# Altium PCB PCB2.PcbDoc
Units mm, origin at the board's own origin, x right, y up, seen from the top; angles counter-clockwise.
Board outline 152.4 x 101.6 mm, 2 copper layers (Top Layer, Bottom Layer); 8 components, 19 nets, 63 pads, 19 vias.
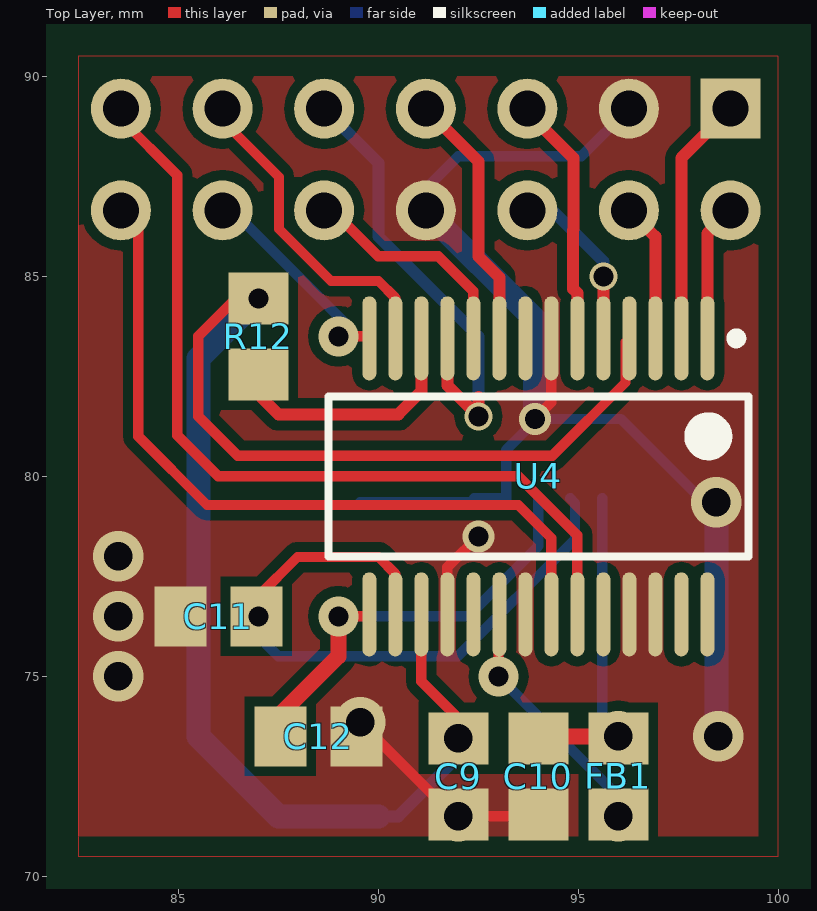
[diagram p0: Top Layer view]
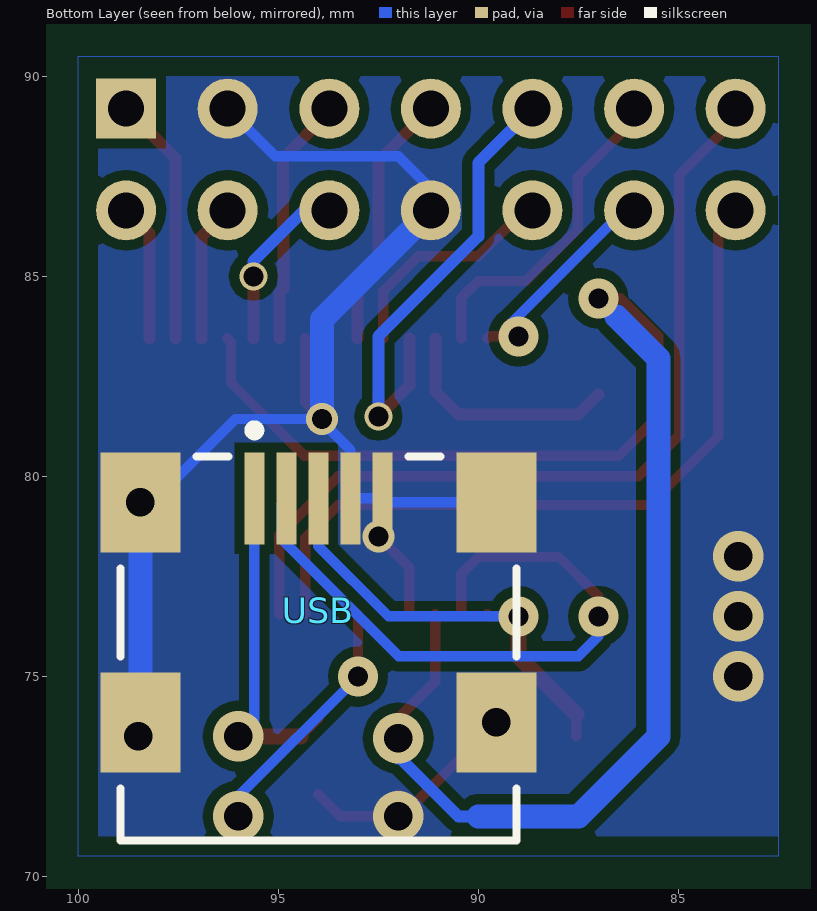
[diagram p1: Bottom Layer view, seen from below]

## Layer stack, top to bottom
Top Layer: signal copper 0.0356
Dielectric: dielectric 0.32, FR-4, Dk 4.8
Bottom Layer: signal copper 0.0356

## Board outline
25.4,25.4 177.8,25.4 177.8,127 25.4,127

## Design rules (kind name [scope] priority, off if disabled: settings)
Clearance [All] p1: gap=0.254
PlaneConnect [All] p1: planeconnectstyle=Direct reliefexpansion=0.508 reliefentries=4 reliefconductorwidth=0.254 reliefairgap=0.254
PolygonConnect [All] p1: connectstyle=Direct reliefconductorwidth=0.254 reliefentries=4 polygonreliefangle="90 Angle" airgapwidth=0.254
RoutingVias [All] p1: holewidth=0.711 width=1.27 viastyle="Through Hole" minholewidth=0.711 minwidth=1.27 maxholewidth=0.711 maxwidth=1.27
SolderMaskExpansion [All] p1: expansion=0.102
Width [All] p1: maxlimit=1 minlimit=0.254 preferedwidth=0.4
27 further rules are at their usual default settings.

## Components (designator, comment, footprint, x,y, rotation, side; value= is the part's Value field where it differs from the comment)
C9 "Cap_UP" 2012[0805] 92,72.5 r90 top
C10 "Cap_UP" 2012[0805] 94,72.5 r270 top
C11 "Cap_UP" 2012[0805] 86,76.5 r0 top
C12 "Cap_UP" 2012[0805] 88.5,73.5 r180 top
FB1 "Ferrite Beed" 2012[0805] 96,72.5 r270 top
R12 "Res" 2012[0805] 87,83.5 r90 top
U4 "FT245RL-Reel" SSOP-28_N 94,80 r270 top
USB "440479-1" USB_Mini 94,75.5 r180 bottom

## Footprints (in the part's own frame and the unit in brackets; to place one, negate y for a bottom-side part, rotate by r counter-clockwise, add the part's x,y. Pads: shape width x height; smd on the part's side, far side on the other; paste and mask are expansions set on the pad)
2012[0805] [mm] "Chip Resistor; Body 2.0 x 1.3 mm (LxW typ)"
  rect 1.3x1.5 smd: 1(-0.95,0) 2(0.95,0)
  body extent -1.22,-0.75 1.28,0.75, height 0.5
SSOP-28_N [mm] "SOP, 28-Leads, Body 10.2x5.3mm, Pitch 0.65mm, IPC Medium Density"
  oval 2.1x0.35 smd: 1(-3.45,4.225) 2(-3.45,3.575) 3(-3.45,2.925) 4(-3.45,2.275) 5(-3.45,1.625) 6(-3.45,0.975) 7(-3.45,0.325) 8(-3.45,-0.325) 9(-3.45,-0.975) 10(-3.45,-1.625) 11(-3.45,-2.275) 12(-3.45,-2.925) 13(-3.45,-3.575) 14(-3.45,-4.225) 15(3.45,-4.225) 16(3.45,-3.575) 17(3.45,-2.925) 18(3.45,-2.275) 19(3.45,-1.625) 20(3.45,-0.975) 21(3.45,-0.325) 22(3.45,0.325) 23(3.45,0.975) 24(3.45,1.625) 25(3.45,2.275) 26(3.45,2.925) 27(3.45,3.575) 28(3.45,4.225)
  silkscreen extent -3.57,-5.25 2,5.25, body extent -2.8,-5.25 2.8,5.25, height 2
USB_Mini [mm]
  rect 0.5x2.3 smd: 1(-1.6,3.95) 2(-0.8,3.95) 3(0,3.95) 4(0.8,3.95) 5(1.6,3.95)
  rect 2x2.5 smd: 6(4.45,3.85) 7(4.45,-1.65) 8(-4.45,3.85) 9(-4.45,-1.65)
  silkscreen extent -4.95,-4.6 4.95,5.77

## Part data
C9 C10 C11 C12: "Capacitor"
R12: "Semiconductor Resistor"
U4: "USB/Parallel FIFO Bi-Directional Data Transfer Chip, SSOP-28, Tape and Reel"
USB: "USB 2.0, Right Angle, SMT, AB Type, Receptacle, 5 Position, Black"

## Free pads (board coordinates)
  rect 1.5x1.5 hole 0.9: 1(98.806,89.19)
  round 1.5 hole 0.9: 2(98.806,86.65) 3(96.266,89.19) 4(96.266,86.65) 5(93.726,89.19) 6(93.726,86.65) 7(91.186,89.19) 8(91.186,86.65) 9(88.646,89.19) 10(88.646,86.65) 11(86.106,89.19) 12(86.106,86.65) 13(83.566,89.19) 14(83.566,86.65)

## Via types
v1: diameter 1.27, hole 0.711, Top Layer to Bottom Layer, 10 vias
v2: diameter 1, hole 0.5, Top Layer to Bottom Layer, 5 vias
v3: diameter 0.8, hole 0.5, Top Layer to Bottom Layer, 2 vias
v4: diameter 0.7, hole 0.5, Top Layer to Bottom Layer, 2 vias

## Nets (pads, with @x,y where several pads share a name; then routed paths per layer and width w, separated by ;. In a path a pad name is that pad's centre, name@x,y a point inside that pad or via, vN(x,y) a via of type N, cw(c..) or ccw(c..) an arc to the next point about the centre after c; other vN are vias at no path point)
3.3V: C9.2 R12.2 U4.4 U4.17 | length 40.6
  Top Layer w0.254: v2(87,84.45) 86.45,84.45 85.5,83.5 85.5,81.5 86.484,80.516 94.352,80.516 96.181,82.345 96.181,83.356 U4.4 ; U4.17 91.075,74.875 C9.2@92,73.95
  Bottom Layer w0.254: v2@86.975,84.475 86.981,84.481 86.5,84 86.55,84 v2(87,84.45)
  Bottom Layer w0.3: 90,71.5 90.5,71.5 v1@92,73
  Bottom Layer w0.4: v1@92,73 v1@92,73.5
  Bottom Layer w0.6: 86.55,84 85.5,82.95 85.5,73.5 87.5,71.5 90,71.5
  other v1: 92,73.45
5V: FB1.2 U4.20 | length 6.3
  Top Layer w0.254: v2(93.007,74.993) 93.007,76.532 U4.20
  Bottom Layer w0.254: v2(93.007,74.993) 96,72 v1(96,71.5)
D+: C12.2 U4.15 USB.3 | length 11.3
  Top Layer w0.254: C12.2 C12.2@87.55,74.05 ; v2(89,76.5) 89.725,76.5 U4.15
  Top Layer w0.4: C12.2@87.55,74.05 89,75.5 v2(89,76.5)
  Bottom Layer w0.254: v2(89,76.5) 92.246,76.5 94,78.254 94,78.827 USB.3
D-: C11.2 U4.16 USB.2 | length 16.4
  Top Layer w0.254: v2(87,76.5) 87,77 87.981,77.981 90.005,77.981 90.425,77.561 U4.16
  Bottom Layer w0.254: v2(87,76.5) 87,76 87.5,75.5 91.989,75.5 94.916,78.427 94.916,79.334 USB.2
GND: C9.1 C10.2 C11.1 C12.1 pad.3 pad.8 U4.7 U4.18 U4.21 U4.25 U4.26 USB.4 USB.5 USB.6 USB.7 USB.8 USB.9 | length 40.2
  Top Layer w0.254: v1(89.55,73.85) 91.85,71.55 C9.1 ; U4.18 91.725,77.725 v3@92.594,78.595 ; C9.1@92,72.05 92.55,71.5 93.45,71.5 C10.2@94,72.05 ; v3(93.913,81.437) 94.325,81.849 U4.7
  Bottom Layer w0.254: USB.6 USB.5@92.494,79.35 ; pad.8 91.186,87.186 92,88 95.076,88 pad.3 ; USB.5 USB.4 93.2,80.662 93.913,81.374 v3(93.913,81.437) 96.063,81.437 98.15,79.35 v1(98.45,79.35)
  Bottom Layer w0.6: pad.8 93.913,83.923 v3(93.913,81.437) ; USB.9 v1(98.45,79.35)
  other v1: 92,71.5 98.5,73.5 83.5,75 83.5,76.5 83.5,78
  other v3: 92.5,78.5
NetC10_1: C10.1 FB1.1 USB.1 | length 8.3
  Top Layer w0.254: C10.1@94,73.95 C10.1@94.45,73.5
  Top Layer w0.4: C10.1@94.45,73.5 v1(96,73.5)
  Bottom Layer w0.254: USB.1 95.6,73.9 v1(96,73.5)
NetR12_1: R12.1 U4.12 | length 5.8
  Top Layer w0.3: R12.1@87,82.05 87.5,81.55 90.5,81.55 91.075,82.125 U4.12
USB_D0: pad.2 U4.1 | length 3.4
  Top Layer w0.3: U4.1 98.225,86.069 pad.2
USB_D1: pad.6 U4.5 | length 4.4
  Top Layer w0.3: U4.5 v4(95.625,85)
  Bottom Layer w0.3: pad.6 94.35,86.65 95.625,85.375 v4(95.625,85)
USB_D2: pad.4 U4.3 | length 3.5
  Top Layer w0.3: pad.4 96.925,85.991 U4.3
USB_D3: pad.9 U4.11 | length 13.2
  Top Layer w0.3: pad.9@88.646,88.958 pad.9 ; U4.11 91.725,82.275 92.469,81.531 92.5,81.531 92.5,81.98 ; v4(92.5,81.5) 92.5,81.98
  Bottom Layer w0.3: pad.9 90,87.836 90,86 92.5,83.5 v4(92.5,81.5) ; v4(92.5,81.5) 92.5,81.984
USB_D4: pad.1 U4.2 | length 6.2
  Top Layer w0.3: U4.2 97.575,87.959 pad.1
USB_D5: pad.7 U4.9 | length 6.5
  Top Layer w0.3: pad.7 92.5,87.876 92.5,85.5 93.025,84.975 U4.9
USB_D6: pad.10 U4.10 | length 5.7
  Top Layer w0.254: pad.10 88.85,86.65 90,85.5 91.5,85.5 92.375,84.625 U4.10
USB_D7: pad.5 U4.6 | length 6.3
  Top Layer w0.3: pad.5 93.726,89.108 94.88,87.954 94.88,86.172 94.871,86.163 94.871,84.688 94.975,84.584 U4.6
USB_RD#: pad.11 U4.13 | length 8.2
  Top Layer w0.254: pad.11 86.106,88.894 87.515,87.485 87.515,86.182 88.816,84.881 90.005,84.881 90.425,84.461 U4.13
USB_RXF#: pad.13 U4.23 | length 21.8
  Top Layer w0.254: pad.13 83.566,88.934 84.975,87.525 84.975,81.025 86,80 93.5,80 94.975,78.525 U4.23
USB_TXE#: pad.14 U4.22 | length 19.1
  Top Layer w0.254: pad.14 84,86.216 84,81 85.718,79.282 93.5,79.282 94.325,78.457 U4.22
USB_WR: pad.12 U4.14 | length 5.7
  Top Layer w0.254: v2(89,83.5) 89.725,83.5 U4.14
  Bottom Layer w0.254: pad.12@86,87 89.25,83.75 v2(89,83.5)
pads on no net: U4.8 U4.19 U4.24 U4.27 U4.28

## Polygon pours and split planes (outlines as drawn)
GND on Top Layer "Top Layer-No Net 1" (solid, shelved, pour order 12): 100,90.5 82.5,90.5 82.5,70.5 100,70.5 100,90.5
GND on Bottom Layer "Top Layer-No Net 1" (solid, shelved, pour order 10): 82.5,90.5 82.5,70.5 100,70.5 100,90.5 82.5,90.5
GND on Bottom Layer "Bottom Layer-No Net" (solid, pour order 5): 82.5,90 82.5,71 99.5,71 99.5,90
GND on Top Layer "Bottom Layer-No Net" (solid, pour order 7): 82.5,90 82.5,71 99.5,71 99.5,90 82.5,90

## Silkscreen, mask and mechanical layers (free items; w line width, h text height)
Mechanical 1:
  lines w0.254: 82.296,70.5 100.076,70.5 100.076,90.46 82.296,90.46 82.296,70.5